# Altium PCB 2013_fdp_banc_de_test.PcbDoc
Units mil, origin at the board's own origin, x right, y up, seen from the top; angles counter-clockwise.
Board outline 2995 x 981 mil, 4 copper layers (1-TOP, 2-SIGNAL, 3-SIGNAL, 4-BOT); 97 components, 61 nets, 203 pads, 23 vias.
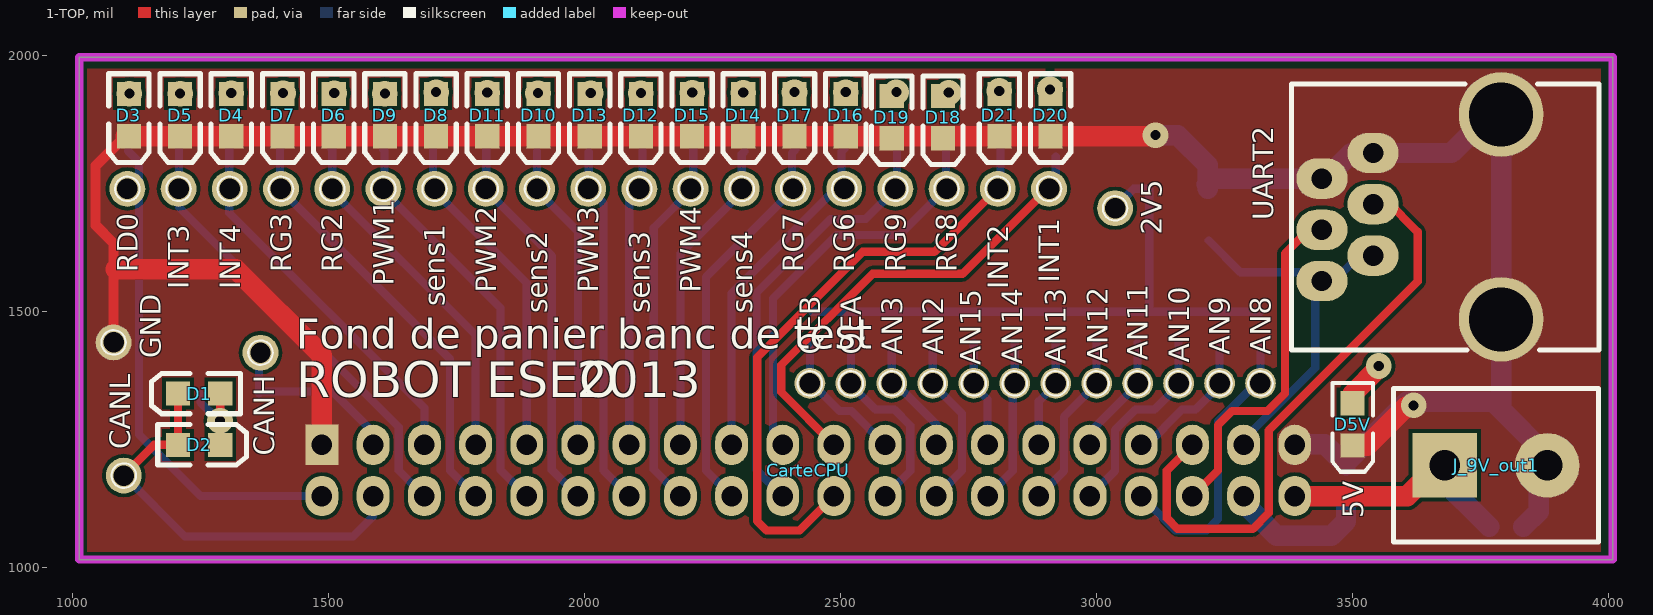
[diagram p0: 1-TOP view]
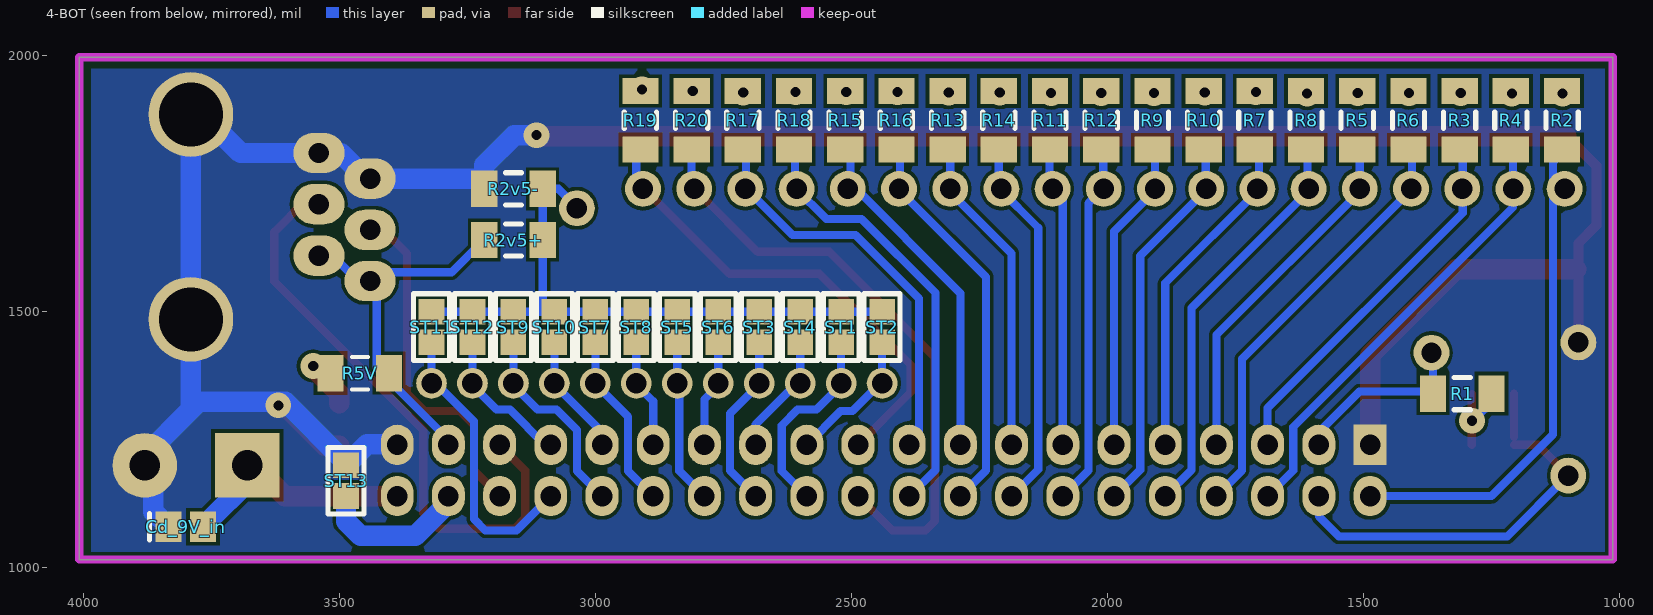
[diagram p1: 4-BOT view, seen from below]
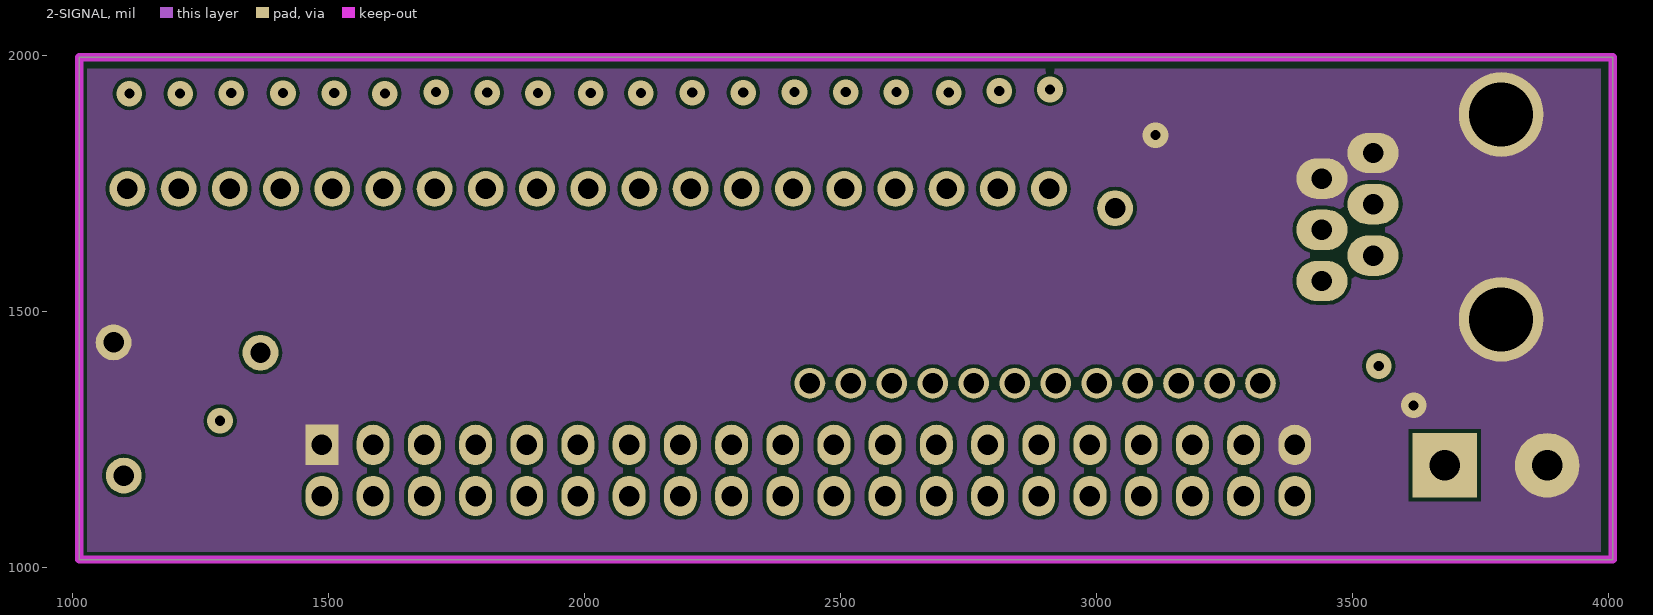
[diagram p2: 2-SIGNAL]
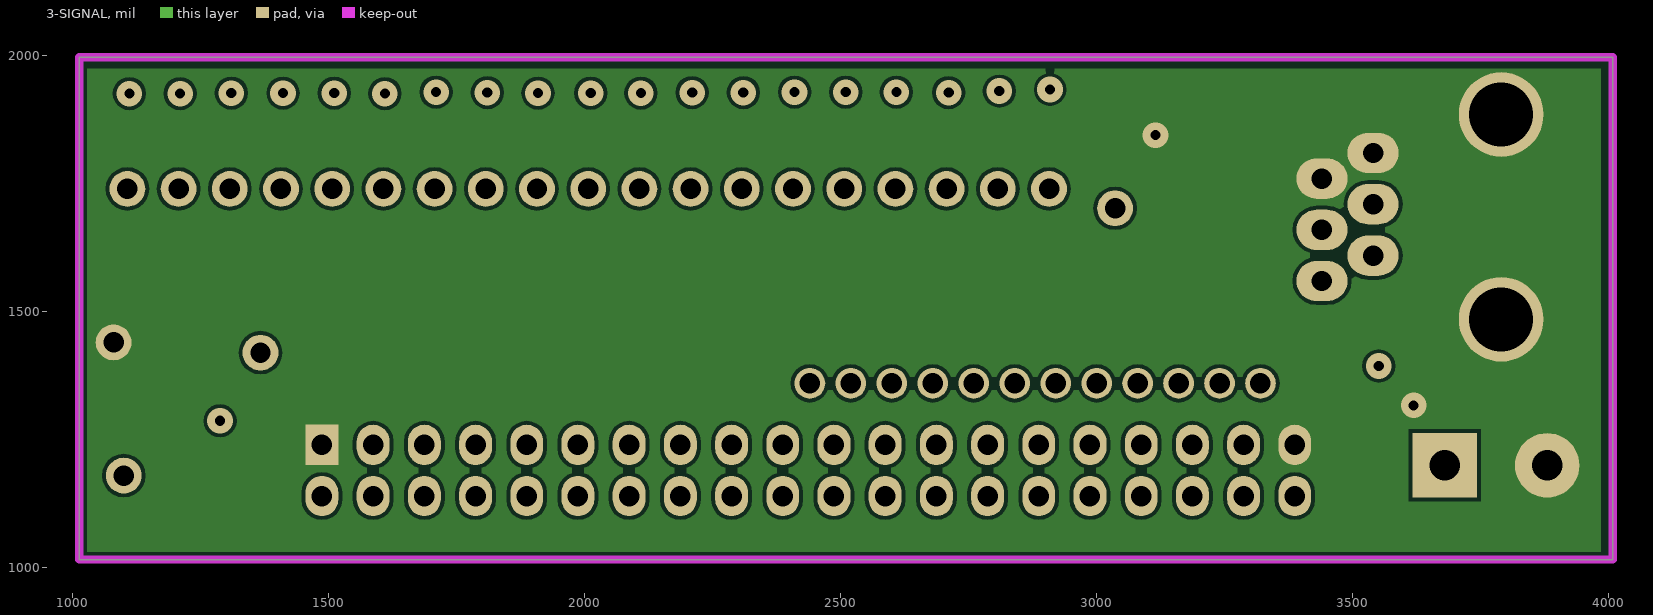
[diagram p3: 3-SIGNAL]
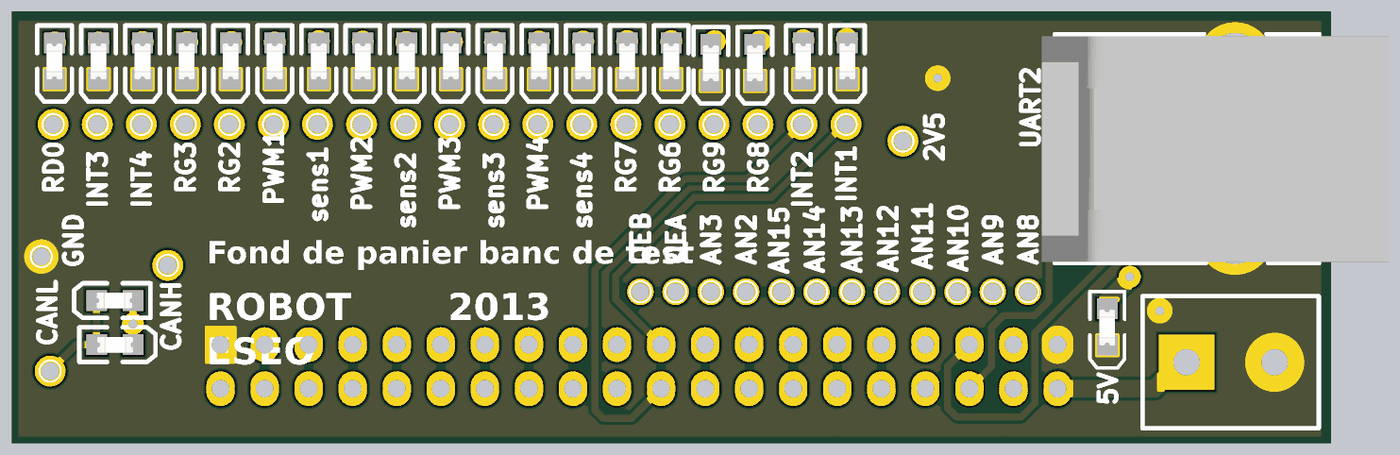
[diagram p4: 3D render of the assembled board from above, using the file's embedded part models]
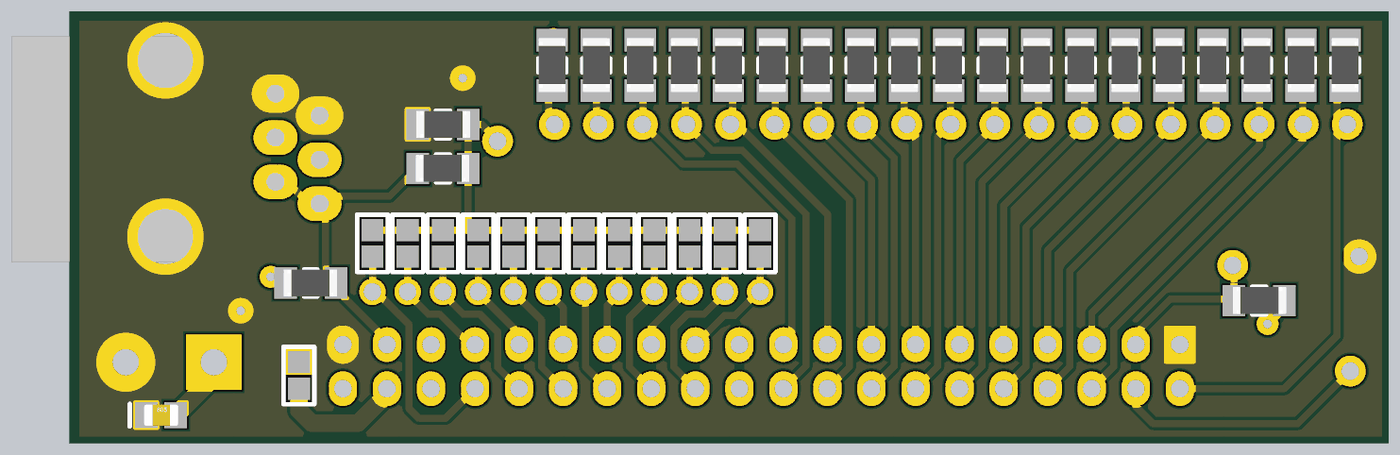
[diagram p5: 3D render of the assembled board from below, using the file's embedded part models]

## Layer stack, top to bottom
1-TOP: signal copper 1.4
Dielectric: core 12.6, FR-4, Dk 4.8
2-SIGNAL: signal copper 1.4
Dielectric: prepreg 12.6, FR-4, Dk 4.8
3-SIGNAL: signal copper 1.4
Dielectric: core 12.6, FR-4, Dk 4.8
4-BOT: signal copper 1.4

## Board outline
1013,1016 1013,1997 4008,1997 4008,1016

## Design rules (kind name [scope] priority, off if disabled: settings)
Clearance [All] p1: gap=7
FabricationTestpoint [(IsPad And (OnTopLayer Or OnBottomLayer))] p1: side=3 testpointundercomponent=TRUE minsize=40 maxsize=100 preferedsize=60 minholesize=0 maxholesize=40 preferedholesize=32 testpointgrid=1 allowsidetop=TRUE allowsidebottom=TRUE usegrid=TRUE gridtolerance=0.01
HoleSize [All] p1: absolutevalues=TRUE maxlimit=200 minlimit=1 maxpercent=80.000 minpercent=20.000
PlaneConnect [All] p1: planeconnectstyle=Direct reliefexpansion=20 reliefentries=4 reliefconductorwidth=10 reliefairgap=10
PolygonConnect [All] p1: connectstyle=Direct reliefconductorwidth=10 reliefentries=4 polygonreliefangle="90 Angle"
RoomDefinition 2013_fdp_banc_de_test [InComponentClass('2013_fdp_banc_de_test')] p1: confinementstyle=ConfineIn formatcopy=TRUE lockcomponents=FALSE outline 0,0 2000,0 2000,1000 0,1000
RoutingVias [All] p1: holewidth=28 width=50 viastyle="Through Hole" minholewidth=28 minwidth=50 maxholewidth=28 maxwidth=50
SilkscreenOverComponentPads [All] p1: minsilkscreentomaskgap=10
SolderMaskExpansion [All] p1: expansion=4
Width [All] p1: maxlimit=200 minlimit=10 preferedwidth=15
24 further rules are at their usual default settings.

## Components (designator, comment, footprint, x,y, rotation, side; value= is the part's Value field where it differs from the comment)
2V5 "Name" "Point Test_D0.9_P0.5mm"#1 3036,1702 r90 top
AN2 "Name" "Point Test_D0.9_P0.5mm"#2 2680,1360 r90 top
AN3 "Name" "Point Test_D0.9_P0.5mm"#2 2600,1360 r90 top
AN8 "Name" "Point Test_D0.9_P0.5mm"#2 3320,1360 r90 top
AN9 "Name" "Point Test_D0.9_P0.5mm"#2 3240,1360 r90 top
AN10 "Name" "Point Test_D0.9_P0.5mm"#2 3160,1360 r90 top
AN11 "Name" "Point Test_D0.9_P0.5mm"#2 3080,1360 r90 top
AN12 "Name" "Point Test_D0.9_P0.5mm"#2 3000,1360 r90 top
AN13 "Name" "Point Test_D0.9_P0.5mm"#2 2920,1360 r90 top
AN14 "Name" "Point Test_D0.9_P0.5mm"#2 2840,1360 r180 top
AN15 "Name" "Point Test_D0.9_P0.5mm"#2 2760,1360 r180 top
CANH "Name" "Point Test_D0.9_P0.5mm"#1 1367,1420 r90 top
CANL "Name" "Point Test_D0.9_P0.5mm"#1 1100,1180 r90 top
CarteCPU "ACTIONNEUR" HE10/40_MAL_DROIT-FDP-ROBOT 1487,1140 r0 top (schematic designator ACTIONNEUR)
Cd_9V_in "10uF" C0805_N 3800,1080 r180 bottom
D1 "LED" LED_0805 1247,1340 r180 top
D2 "LED" LED_0805 1247,1240 r0 top
D3 "LED" LED_0805 1110,1884 r270 top
D4 "LED" LED_0805 1310,1884 r270 top
D5 "LED" LED_0805 1210,1884 r270 top
D5V "LED" LED_0805 3500,1280 r270 top
D6 "LED" LED_0805 1510,1884 r270 top
D7 "LED" LED_0805 1410,1884 r270 top
D8 "LED" LED_0805 1710,1884 r270 top
D9 "LED" LED_0805 1610,1884 r270 top
D10 "LED" LED_0805 1910,1884 r270 top
D11 "LED" LED_0805 1810,1884 r270 top
D12 "LED" LED_0805 2110,1884 r270 top
D13 "LED" LED_0805 2010,1884 r270 top
D14 "LED" LED_0805 2310,1884 r270 top
D15 "LED" LED_0805 2210,1884 r270 top
D16 "LED" LED_0805 2510,1884 r270 top
D17 "LED" LED_0805 2410,1884 r270 top
D18 "LED" LED_0805 2700,1880 r270 top
D19 "LED" LED_0805 2600,1880 r270 top
D20 "LED" LED_0805 2910,1884 r270 top
D21 "LED" LED_0805 2810,1884 r270 top
GND "Name" "Point Test_D0.9_P0.5mm"#1 1080,1440 r90 top
INT1 "Name" "Point Test_D0.9_P0.5mm"#1 2907,1740 r90 top
INT2 "Name" "Point Test_D0.9_P0.5mm"#1 2807,1740 r90 top
INT3 "Name" "Point Test_D0.9_P0.5mm"#1 1207,1740 r90 top
INT4 "Name" "Point Test_D0.9_P0.5mm"#1 1307,1740 r90 top
J_9V_out1 "9V BAT" BORNIER2 3680,1200 r0 top
PWM1 "Name" "Point Test_D0.9_P0.5mm"#1 1607,1740 r90 top
PWM2 "Name" "Point Test_D0.9_P0.5mm"#1 1807,1740 r90 top
PWM3 "Name" "Point Test_D0.9_P0.5mm"#1 2007,1740 r90 top
PWM4 "Name" "Point Test_D0.9_P0.5mm"#1 2207,1740 r90 top
QEA "Name" "Point Test_D0.9_P0.5mm"#2 2520,1360 r90 top
QEB "Name" "Point Test_D0.9_P0.5mm"#2 2440,1360 r90 top
R1 "1k" R1206_N 1307,1340 r180 bottom
R2 "1k" R1206_N 1112,1874 r90 bottom
R2v5+ "1K" R1206_N 3160,1640 r0 bottom
R2v5- "1K" R1206_N 3160,1740 r180 bottom
R3 "1k" R1206_N 1312,1874 r90 bottom
R4 "1k" R1206_N 1212,1874 r90 bottom
R5 "1k" R1206_N 1512,1874 r90 bottom
R5V "1k" R1206_N 3460,1380 r0 bottom
R6 "1k" R1206_N 1412,1874 r90 bottom
R7 "1k" R1206_N 1712,1874 r90 bottom
R8 "1k" R1206_N 1612,1874 r90 bottom
R9 "1k" R1206_N 1912,1874 r90 bottom
R10 "1k" R1206_N 1812,1874 r90 bottom
R11 "1k" R1206_N 2112,1874 r90 bottom
R12 "1k" R1206_N 2012,1874 r90 bottom
R13 "1k" R1206_N 2312,1874 r90 bottom
R14 "1k" R1206_N 2212,1874 r90 bottom
R15 "1k" R1206_N 2512,1874 r90 bottom
R16 "1k" R1206_N 2412,1874 r90 bottom
R17 "1k" R1206_N 2712,1874 r90 bottom
R18 "1k" R1206_N 2612,1874 r90 bottom
R19 "1k" R1206_N 2912,1874 r90 bottom
R20 "1k" R1206_N 2812,1874 r90 bottom
RD0 "Name" "Point Test_D0.9_P0.5mm"#1 1107,1740 r90 top
RG2 "Name" "Point Test_D0.9_P0.5mm"#1 1507,1740 r90 top
RG3 "Name" "Point Test_D0.9_P0.5mm"#1 1407,1740 r90 top
RG6 "Name" "Point Test_D0.9_P0.5mm"#1 2507,1740 r90 top
RG7 "Name" "Point Test_D0.9_P0.5mm"#1 2407,1740 r90 top
RG8 "Name" "Point Test_D0.9_P0.5mm"#1 2707,1740 r90 top
RG9 "Name" "Point Test_D0.9_P0.5mm"#1 2607,1740 r90 top
sens1 "Name" "Point Test_D0.9_P0.5mm"#1 1707,1740 r90 top
sens2 "Name" "Point Test_D0.9_P0.5mm"#1 1907,1740 r90 top
sens3 "Name" "Point Test_D0.9_P0.5mm"#1 2107,1740 r180 top
sens4 "Name" "Point Test_D0.9_P0.5mm"#1 2307,1740 r180 top
ST1 "Goutte Strap_2" "Goutte Strap_2 Pads_Clearance 0.254mm" 2520,1440 r90 bottom
ST2 "Goutte Strap_2" "Goutte Strap_2 Pads_Clearance 0.254mm" 2440,1440 r90 bottom
ST3 "Goutte Strap_2" "Goutte Strap_2 Pads_Clearance 0.254mm" 2680,1440 r90 bottom
ST4 "Goutte Strap_2" "Goutte Strap_2 Pads_Clearance 0.254mm" 2600,1440 r90 bottom
ST5 "Goutte Strap_2" "Goutte Strap_2 Pads_Clearance 0.254mm" 2840,1440 r90 bottom
ST6 "Goutte Strap_2" "Goutte Strap_2 Pads_Clearance 0.254mm" 2760,1440 r90 bottom
ST7 "Goutte Strap_2" "Goutte Strap_2 Pads_Clearance 0.254mm" 3000,1440 r90 bottom
ST8 "Goutte Strap_2" "Goutte Strap_2 Pads_Clearance 0.254mm" 2920,1440 r90 bottom
ST9 "Goutte Strap_2" "Goutte Strap_2 Pads_Clearance 0.254mm" 3160,1440 r90 bottom
ST10 "Goutte Strap_2" "Goutte Strap_2 Pads_Clearance 0.254mm" 3080,1440 r90 bottom
ST11 "Goutte Strap_2" "Goutte Strap_2 Pads_Clearance 0.254mm" 3320,1440 r90 bottom
ST12 "Goutte Strap_2" "Goutte Strap_2 Pads_Clearance 0.254mm" 3240,1440 r90 bottom
ST13 "Goutte Strap_2" "Goutte Strap_2 Pads_Clearance 0.254mm" 3487,1200 r270 bottom
UART2 "UART" RJ11_6/6 3440,1760 r0 top

## Footprints (in the part's own frame and the unit in brackets; to place one, negate y for a bottom-side part, rotate by r counter-clockwise, add the part's x,y. Pads: shape width x height; smd on the part's side, far side on the other; paste and mask are expansions set on the pad)
BORNIER2 [mm] "Connector; Header; 2 Position; screw terminal blocks, Pin Spacing=5.08mm"
  rect 3.2x3.2 hole 1.524: 1(0,0)
  round 3.2 hole 1.524: 2(5.08,0)
  silkscreen extent -2.54,-3.81 7.62,3.81
C0805_N [mm] "Chip Capacitor, Body 2.0x1.3mm, IPC Medium Density"
  rect 1.3x1.5 smd: 1(-0.85,0) 2(0.85,0)
  silkscreen extent -1.8,-0.65 -1.8,0.65, body extent -0.99,-0.63 1.01,0.63, height 0.8
"Goutte Strap_2 Pads_Clearance 0.254mm" [mil] "Goutte Strap_2 Pads_Clearance 0.254mm"
  rect 50x50 smd mask+7.87: 1(0,0) 2(60,0)
  silkscreen extent -35,-35 95,35
HE10/40_MAL_DROIT-FDP-ROBOT [mm] "Connector; HE10; 40 Position; Male; Right Angle; Pin Spacing=2.54mm"
  rect 1.63x2 hole 1.016: 1(0,2.54)
  oval 1.63x2 hole 1.016: 2(0,0) 3(2.54,2.54) 4(2.54,0) 5(5.08,2.54) 6(5.08,0) 7(7.62,2.54) 8(7.62,0) 9(10.16,2.54) 10(10.16,0) 11(12.7,2.54) 12(12.7,0) 13(15.24,2.54) 14(15.24,0) 15(17.78,2.54) 16(17.78,0) 17(20.32,2.54) 18(20.32,0) 19(22.86,2.54) 20(22.86,0) 21(25.4,2.54) 22(25.4,0) 23(27.94,2.54) 24(27.94,0) 25(30.48,2.54) 26(30.48,0) 27(33.02,2.54) 28(33.02,0) 29(35.56,2.54) 30(35.56,0) 31(38.1,2.54) 32(38.1,0) 33(40.64,2.54) 34(40.64,0) 35(43.18,2.54) 36(43.18,0) 37(45.72,2.54) 38(45.72,0) 39(48.26,2.54) 40(48.26,0)
  body extent -5.21,-3.12 53.29,4.7, height 10
LED_0805 [mm] "SM LED; 2 Flat Leads"
  rect 1.2x1.2 smd: 1(-1.05,0) 2(1.05,0)
  silkscreen extent -2.05,-1 2.35,1, body extent -1.05,-0.64 1.06,0.64, height 1.2
"Point Test_D0.9_P0.5mm"#1 [mil] "Test point for PCB_Hole 0.5mm"
  round 70 hole 40: 1(0,0)
  silkscreen extent -24,-24 24,24
"Point Test_D0.9_P0.5mm"#2 [mil] "Test point for PCB_Hole 0.5mm"
  round 60 hole 40: 1(0,0)
  silkscreen extent -24,-24 24,24
R1206_N [mm] "Chip Resistor, Body 3.2x1.6mm, IPC Medium Density"
  rect 1.3x1.8 smd: 1(-1.45,0) 2(1.45,0)
  silkscreen extent -0.4,-0.8 0.4,0.8, body extent -1.68,-0.87 1.68,0.87, height 0.71
RJ11_6/6 [mm] "Connector; RJ11; 6P/6C; Low Profil; Right Angle; Pin Spacing=2.54mm"
  oval 2.54x2 hole 1.016: 1(0,-5.08) 2(2.54,-3.82) 3(0,-2.54) 4(2.54,-1.27) 5(0,0) 6(2.54,1.27)
  round 4.2 hole 3.175: FIX1(8.89,3.18) FIX2(8.89,-6.98)
  silkscreen extent -1.51,-8.51 13.74,4.7, body extent -2.25,-8.43 17.75,4.57, height 16

## Part data
2V5 AN2 AN3 AN8 AN9 AN10 AN11 AN12 AN13 AN14 AN15 CANH CANL GND INT1 INT2 INT3 INT4 PWM1 PWM2 PWM3 PWM4 QEA QEB RD0 RG2 RG3 RG6 RG7 RG8 RG9 sens1 sens2 sens3 sens4: library part "Point Test_2", "Point test"
CarteCPU: library part HE10/40, "Connector; HE10; 40 Position; Male"
Cd_9V_in: library part Condensateur, "Capacitor"
D1 D2 D3 D4 D5 D5V D6 D7 D8 D9 D10 D11 D12 D13 D14 D15 D16 D17 D18 D19 D20 D21: "Typical LED"
J_9V_out1: library part BORNIER2, "Terminal blocks, 2 pins, pitch=5mm"
R1 R2 R2v5+ R2v5- R3 R4 R5 R5V R6 R7 R8 R9 R10 R11 R12 R13 R14 R15 R16 R17 R18 R19 R20: library part Resistor, "Resistor"
UART2: library part CONNECTEUR_RJ12

## Via types
v1: diameter 50, hole 20, 1-TOP to 4-BOT, 23 vias

## Nets (pads, with @x,y where several pads share a name; then routed paths per layer and width w, separated by ;. In a path a pad name is that pad's centre, name@x,y a point inside that pad or via, vN(x,y) a via of type N, cw(c..) or ccw(c..) an arc to the next point about the centre after c; other vN are vias at no path point)
2V5: 2V5.1 R2v5+.1 R2v5-.2 ST1.2 ST2.2 ST3.2 ST4.2 ST5.2 ST6.2 ST7.2 ST8.2 ST9.2 ST10.2 ST11.2 ST12.2 | length 1197.6
  4-BOT w16: ST2.2@2444,1500 ST1.2 ST4.2 ST3.2 ST6.2 ST5.2 ST8.2 ST7.2 ST10.2 ST10.2@3100,1500 ; 2V5.1@3037,1705 3072,1740 R2v5-.2 R2v5+.1 3102.91,1502.91 ST10.2@3100,1500 ; ST11.2 ST12.2 ST9.2 ST10.2@3100,1500
5V: CarteCPU.37 R2v5+.2 R5V.1 UART2.1 UART2.2 | length 722.2
  4-BOT w16: R2v5+.2@3219,1639 3281,1577 3423,1577 UART2.1 ; CarteCPU.37@3287,1250 3427,1390 3427,1485 UART2.1@3427,1554 ; UART2.1@3457,1553 3513.61,1609.61 UART2.2
AN2: AN2.1 CarteCPU.26 ST3.1 | length 341.1
  4-BOT w16: AN2.1@2680,1357 AN2.1 ST3.1 ; AN2.1@2683,1355 2737,1301 2737,1190 CarteCPU.26
AN3: AN3.1 CarteCPU.25 ST4.1 | length 233.4
  4-BOT w16: AN3.1@2600,1364 ST4.1 ; AN3.1@2604,1363 2687,1280 CarteCPU.25
AN8: AN8.1 CarteCPU.34 ST11.1 | length 563.5
  4-BOT w16: CarteCPU.34 3154,1073 3215,1073 3237,1095 3237,1286 3311,1360 AN8.1 AN8.1@3322,1360 ; AN8.1@3320,1370 ST11.1
AN9: AN9.1 CarteCPU.33 ST12.1 | length 285.3
  4-BOT w16: CarteCPU.33 3098,1240 3167,1309 3193,1309 AN9.1@3243,1359 ; AN9.1 ST12.1
AN10: AN10.1 CarteCPU.32 ST9.1 | length 386.9
  4-BOT w16: CarteCPU.32 3036,1189 3036,1269 3076,1309 3113,1309 AN10.1@3159,1355 ; AN10.1@3160,1361 ST9.1
AN11: AN11.1 CarteCPU.31 ST10.1 | length 235.2
  4-BOT w16: CarteCPU.31 2987,1265 AN11.1@3084,1362 ; AN11.1@3080,1367 ST10.1
AN12: AN12.1 CarteCPU.30 ST7.1 | length 343.2
  4-BOT w16: CarteCPU.30 2936,1189 2936,1295 AN12.1@3001,1360 ; AN12.1@3000,1364 ST7.1
AN13: AN13.1 CarteCPU.29 ST8.1 | length 200.7
  4-BOT w16: CarteCPU.29 2887,1325 AN13.1@2920,1358 ; AN13.1@2920,1371 ST8.1
AN14: AN14.1 CarteCPU.28 ST5.1 | length 314
  4-BOT w16: CarteCPU.28 2836,1189 2836,1353 AN14.1@2840,1357 ; AN14.1@2840,1365 ST5.1
AN15: AN15.1 CarteCPU.27 ST6.1 | length 209
  4-BOT w16: AN15.1@2758,1358 2787,1329 CarteCPU.27 ; AN15.1@2760,1361 ST6.1
CAN_H: CANH.1 CarteCPU.3 R1.1 | length 349.8
  4-BOT w16: R1.1 CANH.1@1364.09,1418.09 ; R1.1@1373,1344 1508,1344 1587,1265 CarteCPU.3
CAN_L: CANL.1 CarteCPU.4 D1.2 D2.1 | length 798.7
  1-TOP w16: CANL.1@1104,1185 1159,1240 D2.1 ; D2.1@1205.66,1255.34 D1.2
  4-BOT w16: CANL.1@1102,1178 1219,1061 1548,1061 1587,1100 CarteCPU.4
GND: CarteCPU.1 CarteCPU.39 Cd_9V_in.1 D3.2 D4.2 D5.2 D5V.2 D6.2 D7.2 D8.2 D9.2 D10.2 D11.2 D12.2 D13.2 D14.2 D15.2 D16.2 D17.2 D18.2 D19.2 D20.2 D21.2 GND.1 J_9V_out1.2 R2v5-.1 ST13.1 UART2.5 UART2.6 UART2.FIX1 UART2.FIX2 | length 5326
  1-TOP w20: GND.1 1080,1634 1045,1669 1045,1785 D3.2@1101,1841
  1-TOP w40: 1084,1583 1319,1583 1487,1415 CarteCPU.1 ; D3.2@1103.34,1842.66 D3.2 D5.2 D4.2 D7.2 D6.2 D9.2 D8.2 D11.2 D10.2 D13.2 D12.2 D15.2 D14.2 D17.2 D16.2 D21.2 D20.2 v1@3114.34,1842.66 ; D5V.2 3528.66,1238.66 3604,1314 v1@3616,1314
  4-BOT w40: v1@3119,1845 3158,1845 3217.09,1785.91 R2v5-.1@3217.09,1751.09 ; R2v5-.1@3215,1749 R2v5-.1@3217.09,1751.09 ; R2v5-.1 R2v5-.1@3217.09,1751.09 ; CarteCPU.39@3392,1241 3446,1241 ST13.1 3487,1205 3606,1324 3775,1324 J_9V_out1.2@3893,1206 ; UART2.5 3226,1760 R2v5-.1@3217.09,1751.09 ; UART2.5@3449,1762 3497,1810 UART2.6 3693,1810 UART2.FIX1@3782,1899 ; 3790,1321 UART2.FIX2 ; UART2.FIX2@3790,1508 UART2.FIX1 ; Cd_9V_in.1 3863,1109.54 J_9V_out1.2@3863,1199
  other v1: 3619,1317 3115,1845
GND_CARTE: CarteCPU.38 ST13.2 | length 292.2
  4-BOT w40: CarteCPU.38@3284,1130 3352,1062 3458,1062 3487,1091 ST13.2
INT1: CarteCPU.21 INT1.1 R19.1 | length 919.5
  1-TOP w16: CarteCPU.21 2384,1343 2384,1396 2562,1574 2738,1574 INT1.1@2903,1739 ; INT1.1@2903.5,1738.5 INT1.1@2904,1739
  4-BOT w16: INT1.1@2910,1748 2920,1758 R19.1@2920,1802.91
INT2: CarteCPU.22 INT2.1 R20.1 | length 1183.9
  1-TOP w16: CarteCPU.22 2420,1073 2355,1073 2337,1091 2337,1411 2543,1617 2683,1617 INT2.1@2802,1736 ; INT2.1@2802.5,1735.5 INT2.1 INT2.1@2809,1742
  4-BOT w16: INT2.1@2812,1747 R20.1
INT3: CarteCPU.6 INT3.1 R4.1 | length 874.4
  4-BOT w16: R4.1@1208,1816 1208,1704 1637,1275 1637,1190 CarteCPU.6
INT4: CarteCPU.5 INT4.1 R3.1 | length 735.8
  4-BOT w16: R3.1@1306,1818 1306,1740 1306,1693 1687,1312 CarteCPU.5
NetD1_1: D1.1 D2.2 R1.2 | length 158.8
  1-TOP w16: D2.2 D1.1@1288.34,1339.34
  4-BOT w16: R1.2 1249.91,1323.09 v1@1280,1293
  other v1: 1288,1287
NetD3_1: D3.1 R2.2
  other v1: 1111,1926
NetD4_1: D4.1 R3.2
  other v1: 1310,1927
NetD5_1: D5.1 R4.2
  other v1: 1210,1926
NetD5V_1: D5V.1 R5V.2 | length 90.8
  1-TOP w40: D5V.1 3500,1340 v1@3551,1391
  other v1: 3551,1394
NetD6_1: D6.1 R5.2
  other v1: 1511,1927
NetD7_1: D7.1 R6.2
  other v1: 1411,1927
NetD8_1: D8.1 R7.2
  other v1: 1710,1929
NetD9_1: D9.1 R8.2
  other v1: 1610,1926
NetD10_1: D10.1 R9.2
  other v1: 1909,1927
NetD11_1: D11.1 R10.2
  other v1: 1810,1928
NetD12_1: D12.1 R11.2
  other v1: 2110,1927
NetD13_1: D13.1 R12.2
  other v1: 2012,1927
NetD14_1: D14.1 R13.2
  other v1: 2310,1928
NetD15_1: D15.1 R14.2
  other v1: 2210,1928
NetD16_1: D16.1 R15.2
  other v1: 2510,1929
NetD17_1: D17.1 R16.2
  other v1: 2410,1929
NetD18_1: D18.1 R17.2
  other v1: 2711,1928
NetD19_1: D19.1 R18.2
  other v1: 2609,1929
NetD20_1: D20.1 R19.2
  other v1: 2909,1934
NetD21_1: D21.1 R20.2
  other v1: 2810,1931
PWM1: CarteCPU.10 PWM1.1 R8.1 | length 793.4
  4-BOT w16: R8.1@1606,1817 1609,1814 1609,1734 1836,1507 1836,1191 CarteCPU.10
PWM2: CarteCPU.12 PWM2.1 R10.1 | length 751.1
  4-BOT w16: R10.1@1808,1817 1808,1740 1808,1737 1936,1609 1936,1191 CarteCPU.12
PWM3: CarteCPU.14 PWM3.1 R12.1 | length 704.7
  4-BOT w16: R12.1@2008,1812 2008,1741 2037,1712 2037,1190 CarteCPU.14
PWM4: CarteCPU.16 PWM4.1 R14.1 | length 731.4
  4-BOT w16: CarteCPU.16 2135,1192 2135,1664 2212,1741 R14.1@2212,1818
QEA: CarteCPU.24 QEA.1 ST1.1 | length 382.8
  4-BOT w16: QEA.1@2518,1359 2568,1309 2605,1309 2636,1278 2636,1189 CarteCPU.24 ; QEA.1@2520,1367 ST1.1
QEB: CarteCPU.23 QEB.1 ST2.1 | length 269.5
  4-BOT w16: QEB.1@2440,1366 ST2.1 ; QEB.1@2442,1362 2498,1306 2521,1306 CarteCPU.23
RD0: CarteCPU.2 R2.1 RD0.1 | length 969.8
  4-BOT w16: R2.1@1108,1814 1130,1792 1130,1260 1250,1140 CarteCPU.2
RG2: CarteCPU.7 R5.1 RG2.1 | length 694.4
  4-BOT w16: R5.1@1506,1818 1507,1817 RG2.1 1507,1735 1787,1455 CarteCPU.7
RG3: CarteCPU.8 R6.1 RG3.1 | length 840.1
  4-BOT w16: R6.1@1407,1821 1405,1819 1405,1740 1737,1408 1737,1190 CarteCPU.8
RG6: CarteCPU.17 R15.1 RG6.1 | length 669.1
  4-BOT w16: CarteCPU.17 2287,1536 2502,1751 2502,1813 R15.1@2507,1818
RG7: CarteCPU.18 R16.1 RG7.1 | length 770.2
  4-BOT w16: CarteCPU.18 2237,1190 2237,1568 2405,1736 2405,1810 R16.1@2412,1817
RG8: CarteCPU.19 R17.1 RG8.1 | length 794.9
  4-BOT w16: CarteCPU.19 2368,1259 2368,1526 2492,1650 2615,1650 2706,1741 R17.1@2706,1815
RG9: CarteCPU.20 R18.1 RG9.1 | length 854
  4-BOT w16: CarteCPU.20 2336,1191 2336,1537 2480,1681 2549,1681 2610,1742 R18.1@2610,1819
SENS1: CarteCPU.9 R7.1 sens1.1 | length 652.8
  4-BOT w16: R7.1@1704,1817 1704,1740 1704,1739 1887,1556 CarteCPU.9
SENS2: CarteCPU.11 R9.1 sens2.1 | length 606.1
  4-BOT w16: R9.1@1907,1813 sens2.1 1907,1737 1987,1657 CarteCPU.11
SENS3: CarteCPU.13 R11.1 sens3.1 | length 584.8
  4-BOT w16: CarteCPU.13 2087,1721 2113,1747 R11.1@2113,1814
SENS4: CarteCPU.15 R13.1 sens4.1 | length 624.8
  4-BOT w16: CarteCPU.15 2187,1614 2307,1734 sens4.1 2307,1808 R13.1@2312,1813
U2RX: CarteCPU.35 UART2.4 | length 1140.1
  1-TOP w16: CarteCPU.35 3137,1190 3137,1097 3158,1076 3305,1076 3336,1107 3336,1268 3627,1559 3627,1656 UART2.4@3566,1717
U2TX: CarteCPU.36 UART2.3 | length 652.2
  1-TOP w16: CarteCPU.36 3237,1190 3237,1279 3264,1306 3334,1306 3368,1340 3368,1614 UART2.3@3412,1658
VCC: CarteCPU.40 Cd_9V_in.2 J_9V_out1.1 | length 443.6
  1-TOP w40: CarteCPU.40 3607,1140 J_9V_out1.1@3665,1198
  4-BOT w16: J_9V_out1.1@3666,1179 J_9V_out1.1@3667.54,1179
  4-BOT w40: J_9V_out1.1@3667.54,1179 Cd_9V_in.2

## Polygon pours and split planes (outlines as drawn)
GND on 1-TOP "1-GND" (solid, pour order 1000): 1027.16,1975 3985,1975 3985,1027 1027.16,1027
GND on 2-SIGNAL "2-GND" (solid, pour order 1000): 1027.16,1975 3985,1975 3985,1027 1027.16,1027
GND on 3-SIGNAL "3-GND" (solid, pour order 1000): 1027.16,1975 3985,1975 3985,1027 1027.16,1027
GND on 4-BOT "4-GND" (solid, pour order 1000): 1027.16,1975 3985,1975 3985,1027 1027.16,1027

## Keep-outs
Keep-Out Layer:
  the board outline again, w16

## Silkscreen, mask and mechanical layers (free items; w line width, h text height)
Top Overlay:
  text "Fond de panier banc de test" at 1437,1408 h100
  text "ROBOT ESEO" at 1437,1310 h120
  text "2013" at 1985,1310 h120
  text "5V" at 3521,1097 h40 r90

## Dimensions
1013,1997 to 1013,1016 on Mechanical 15
1013,1016 to 4008,1016 on Mechanical 15